# Altium PCB PCB.PcbDoc
Units mm, origin at the board's own origin, x right, y up, seen from the top; angles counter-clockwise.
Board outline 60.96 x 89.28 mm, 2 copper layers (Top Layer, Bottom Layer); 23 components, 27 nets, 93 pads, 0 vias.
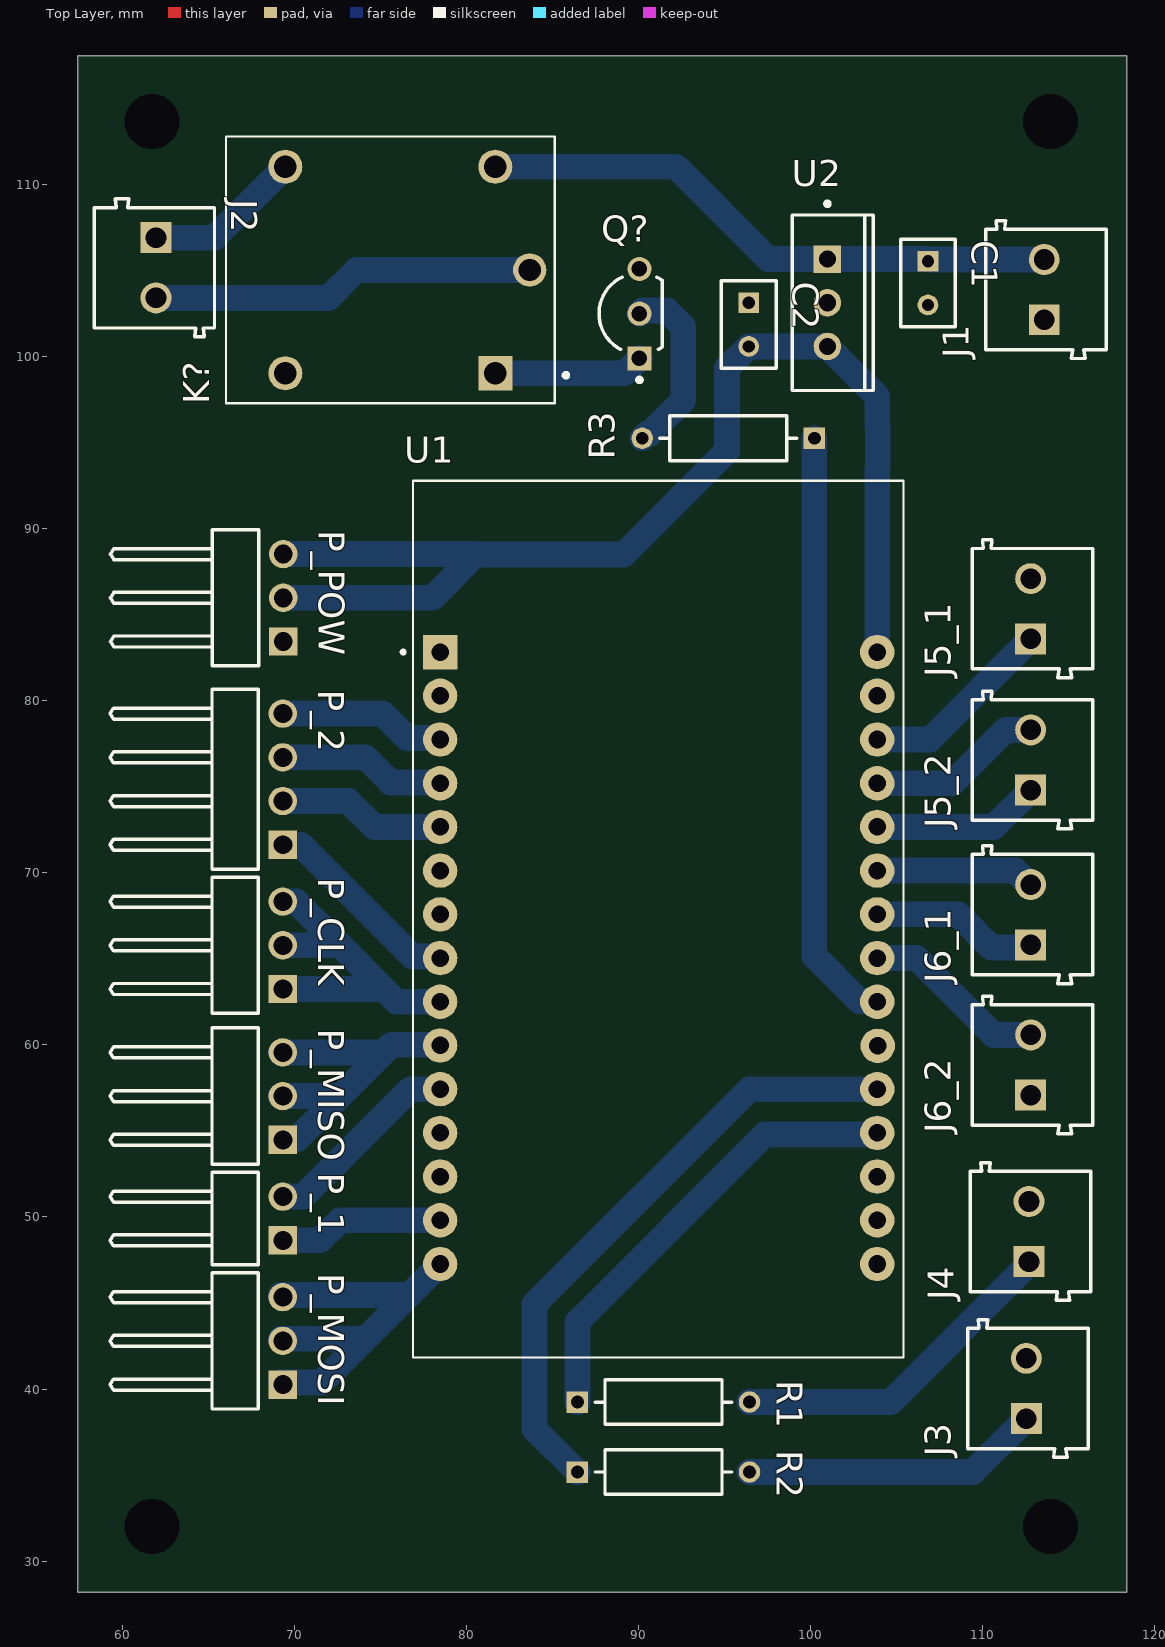
[diagram p0: Top Layer view]
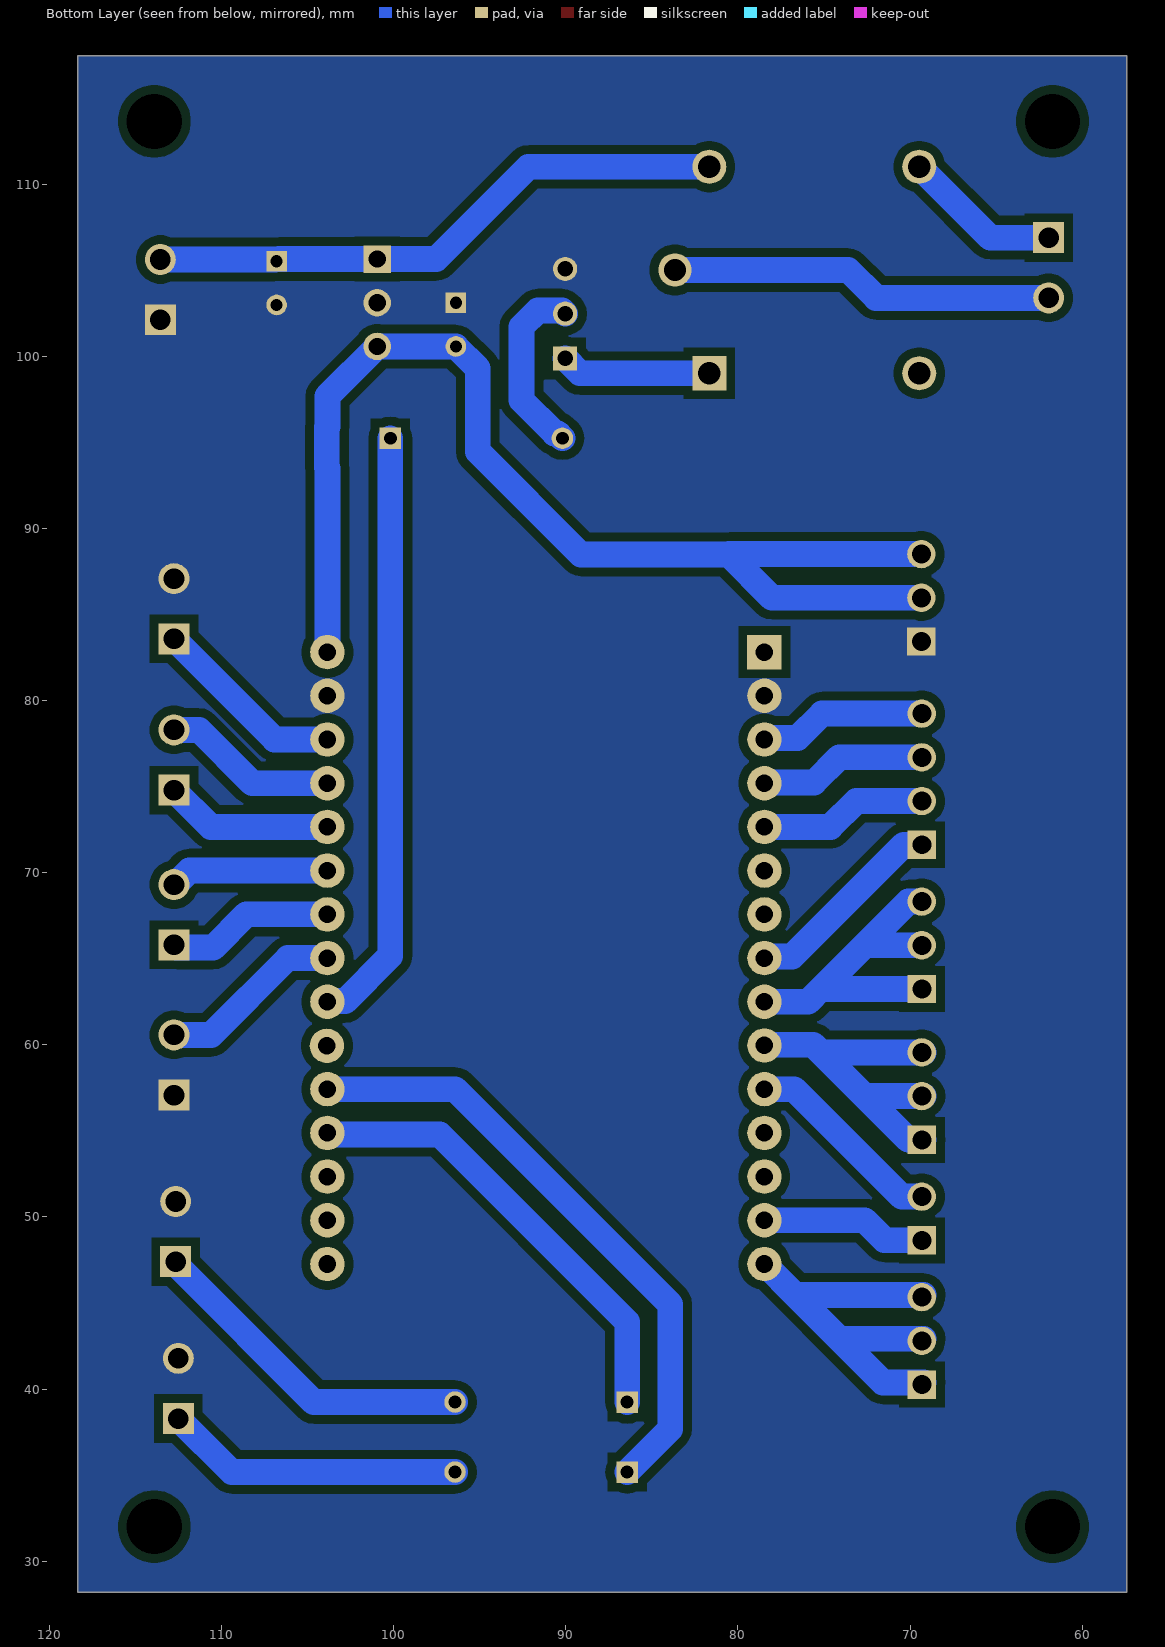
[diagram p1: Bottom Layer view, seen from below]
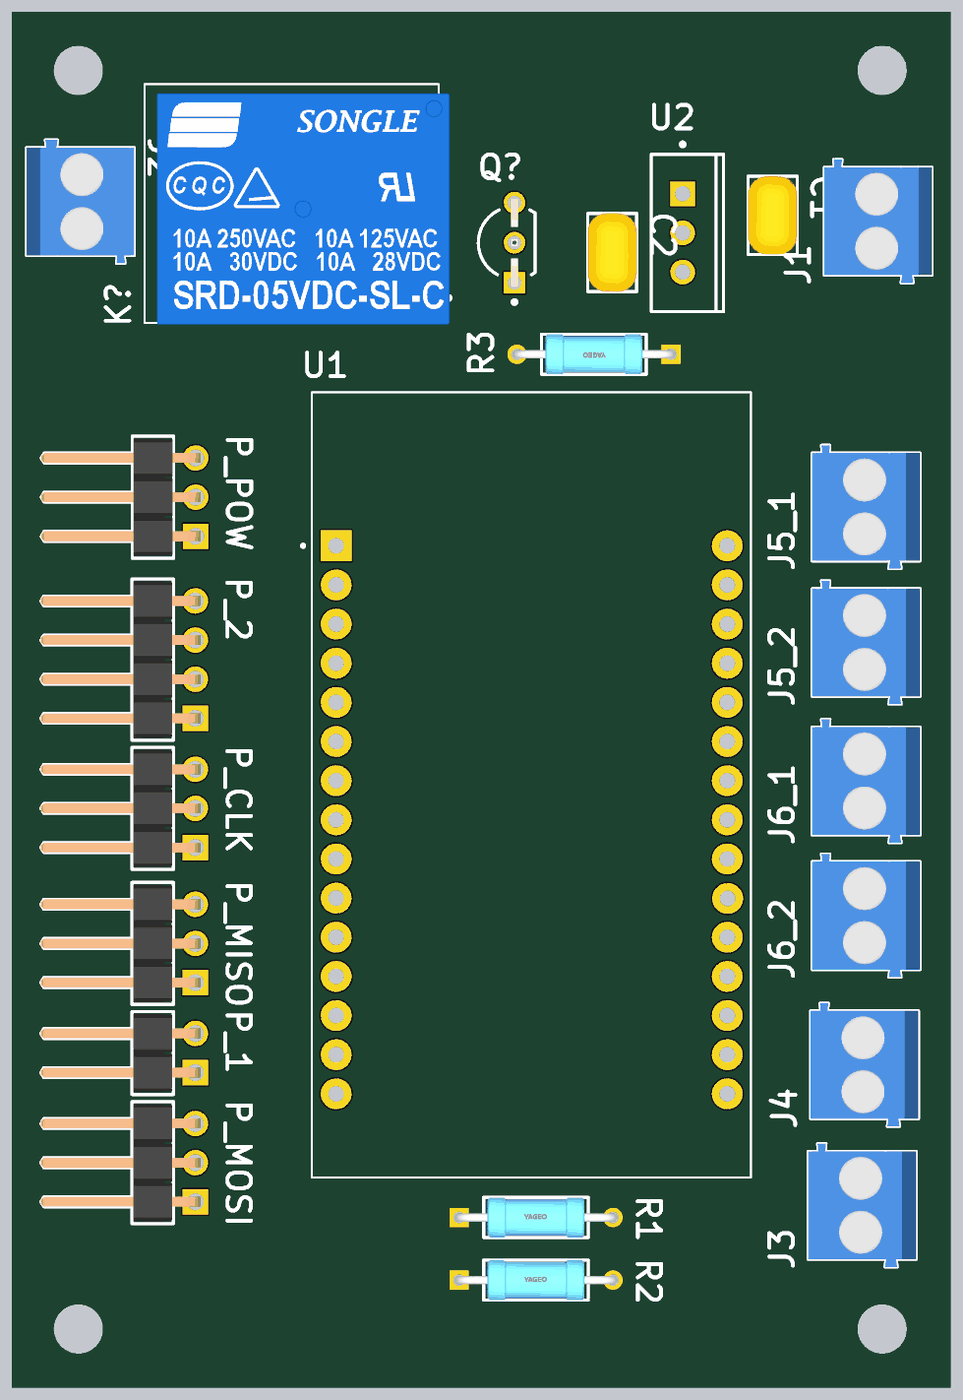
[diagram p2: 3D render of the assembled board from above, using the file's embedded part models]

## Layer stack, top to bottom
Top Solder: solder mask 0.0102, Solder Resist, Dk 3.5
Top Layer: signal copper 0.0356
Dielectric 1: dielectric 0.32, FR-4, Dk 4.8
Bottom Layer: signal copper 0.0356
Bottom Solder: solder mask 0.0102, Solder Resist, Dk 3.5

## Board outline
57.404,28.194 57.404,117.475 118.364,117.475 118.364,28.194

## Design rules (kind name [scope] priority, off if disabled: settings)
Clearance [All] p1: gap=0.5 ignorepadtopadclearanceinfootprint=TRUE except(1: Arc-Arc Arc-Track Track-Track)
PlaneClearance [All] p1: clearance=0.5
PlaneConnect [All] p1: planeconnectstyle=Direct reliefexpansion=0.508 reliefentries=4 reliefconductorwidth=0.254 reliefairgap=0.254
PolygonConnect [All] p1: connectstyle=Direct reliefconductorwidth=0.254 reliefentries=4 polygonreliefangle="90 Angle" airgapwidth=0.254
RoomDefinition Esquematico [InComponentClass('Esquematico')] p1: confinementstyle=ConfineIn formatcopy=TRUE lockcomponents=FALSE outline 57.531,28.321 117.983,28.321 117.983,117.094 57.531,117.094
RoutingLayers [All] p1: top layer_v5=FALSE bottom layer_v5=TRUE
RoutingVias [All] p1: holewidth=0.711 width=1.27 viastyle="Through Hole" minholewidth=0.711 minwidth=1.27 maxholewidth=0.711 maxwidth=1.27
SolderMaskExpansion [All] p1: expansion=0.102 istentingtop=FALSE
Width [All] p1: maxlimit=2 minlimit=1 preferedwidth=1.5
27 further rules are at their usual default settings.

## Components (designator, comment, footprint, x,y, rotation, side; value= is the part's Value field where it differs from the comment)
C1 "SR205C104KAR" FP-SR20-MFG 106.807,104.267 r270 top value=100nF
C2 "SR205C104KAR" FP-SR20-MFG 96.393,101.854 r270 top value=100nF
J1 "691103110002" 691103110002 113.665,103.886 r90 top
J2 "691103110002" 691103110002 61.849,105.156 r270 top
J3 "691103110002" 691103110002 112.622,40.033 r90 top
J4 "691103110002" 691103110002 112.776,49.149 r90 top
J5_1 "691103110002" 691103110002 112.876,85.344 r90 top
J5_2 "691103110002" 691103110002 112.876,76.553 r90 top
J6_1 "691103110002" 691103110002 112.876,67.564 r90 top
J6_2 "691103110002" 691103110002 112.876,58.829 r90 top
K? "SRD-05VDC-SL-C" RELAY_SRD-05VDC-SL-C 75.565,105.029 r180 top
P_1 "61300211021" 61300211021 66.548,49.911 r270 top
P_2 "61300411021" 61300411021 66.548,75.438 r270 top
P_CLK "61300311021" 61300311021 66.548,65.786 r270 top
P_MISO "61300311021" 61300311021 66.548,57.023 r270 top
P_MOSI "61300311021" 61300311021 66.548,42.799 r270 top
P_POW "61300311021" 61300311021 66.572,85.979 r270 top
Q? "P2N2222ARL1G" ONSC-TO-92-3-29-11_AM_BL 90.043,102.489 r90 top
R1 "MFR-25FBF52-1K18" FP-MFR-25-MFG 91.44,39.243 r0 top value=1.18kΩ
R2 "MFR-25FBF52-1K18" FP-MFR-25-MFG 91.44,35.179 r0 top value=1.18kΩ
R3 "MFR-25FBF52-1K18" FP-MFR-25-MFG 95.203,95.25 r180 top value=1.18kΩ
U1 "ESP32-DEVKIT-V1" MODULE_ESP32_DEVKIT_V1 91.162,67.31 r0 top locked
U2 "LM7805CT" FAIR-TO-220-3 100.965,103.124 r0 top

## Footprints (in the part's own frame and the unit in brackets; to place one, negate y for a bottom-side part, rotate by r counter-clockwise, add the part's x,y. Pads: shape width x height; smd on the part's side, far side on the other; paste and mask are expansions set on the pad)
61300211021 [mm] "Pin Header, pitch 2.54 mm, THT, Angled, single row, 2p"
  rect 1.65x1.65 hole 1.1: 1(1.27,2.77)
  round 1.65 hole 1.1: 2(-1.27,2.77)
  silkscreen extent -2.69,-7.27 2.69,1.35, body extent -2.54,-7.27 2.54,3.09, height 2.58
61300311021 [mm] "Pin Header, pitch 2.54 mm, THT, Angled, single row, 3p"
  rect 1.65x1.65 hole 1.1: 1(2.54,2.77)
  round 1.65 hole 1.1: 2(0,2.77) 3(-2.54,2.77)
  silkscreen extent -3.96,-7.27 3.96,1.35, body extent -3.81,-7.27 3.81,3.09, height 2.58
61300411021 [mm] "Pin Header, pitch 2.54 mm, THT, Angled, single row, 4p"
  rect 1.65x1.65 hole 1.1: 1(3.81,2.77)
  round 1.65 hole 1.1: 2(1.27,2.77) 3(-1.27,2.77) 4(-3.81,2.77)
  silkscreen extent -5.23,-7.27 5.23,1.35, body extent -5.08,-7.27 5.08,3.09, height 2.58
691103110002 [mm] "3,50mm - modular - blue - Horizontal wire entry - Pressure clamp - 8,4mm height - 02p"
  rect 1.8x1.8 hole 1.2: 1(-1.75,0.1)
  round 1.8 hole 1.2: 2(1.75,0.1)
  silkscreen extent -4,-3.5 4,3.5, body extent -4,-3.5 4,3.5, height 8.45
FAIR-TO-220-3 [mm] "FM, 3-Leads, Body 10.2x4.7mm, Pitch 2.54mm"
  rect 1.6x1.6 hole 1: 1(0,2.54)
  round 1.6 hole 1: 2(0,0) 3(0,-2.54)
  silkscreen extent -2.04,-5.1 2.66,5.87, body extent -2.04,-5.1 2.66,5.1, height 18.95
FP-MFR-25-MFG [mm]
  rect 1.25x1.25 hole 0.75 paste-1000 mask+0: 1(-5,0)
  round 1.25 hole 0.75 paste-1000 mask+0: 2(5,0)
  silkscreen extent -3.97,-1.3 3.97,1.3, body extent -5.72,-1.4 5.72,1.4, height 0.25
FP-SR20-MFG [mm]
  rect 1.2x1.2 hole 0.7 paste-1000 mask+0: 1(-1.27,0)
  round 1.2 hole 0.7 paste-1000 mask+0: 2(1.27,0)
  silkscreen extent -2.54,-1.59 2.54,1.59, body extent -2.64,-1.69 2.64,1.69, height 0.25
MODULE_ESP32_DEVKIT_V1 [mm]
  rect 2x2 hole 1.02: 1(-12.7,15.515)
  round 2 hole 1.02: 2(-12.7,12.975) 3(-12.7,10.435) 4(-12.7,7.895) 5(-12.7,5.355) 6(-12.7,2.815) 7(-12.7,0.275) 8(-12.7,-2.265) 9(-12.7,-4.805) 10(-12.7,-7.345) 11(-12.7,-9.885) 12(-12.7,-12.425) 13(-12.7,-14.965) 14(-12.7,-17.505) 15(-12.7,-20.045) 16(12.7,-20.045) 17(12.7,-17.505) 18(12.7,-14.965) 19(12.7,-12.425) 20(12.7,-9.885) 22(12.7,-4.805) 23(12.7,-2.265) 24(12.7,0.275) 25(12.7,2.815) 26(12.7,5.355) 27(12.7,7.895) 28(12.7,10.435) 29(12.7,12.975) 30(12.7,15.515)
  round 3 on Mech13: ""(-12.28,-23.475) ""(-12.28,23.475) ""(12.23,-23.475) ""(12.23,23.475)
  silkscreen extent -14.95,-25.47 14.23,25.47
ONSC-TO-92-3-29-11_AM_BL [mm] "TO, 3-Leads, Body Dia 4.7mm, Pitch 2.6mm"
  rect 1.4x1.4 hole 0.9: 1(-2.6,0)
  round 1.4 hole 0.9: 2(0,0) 3(2.6,0)
  silkscreen extent -3.97,-1.34 2.13,2.35, body extent -2.84,-1.34 2.84,2.35, height 5.33
RELAY_SRD-05VDC-SL-C [mm]
  rect 1.98x1.98 hole 1.32: A1(-6.1,6)
  round 1.98 hole 1.32: A2(-6.1,-6) NC(6.1,6) NO(6.1,-6)
  round 1.935 hole 1.29: COM(-8.1,0)
  silkscreen extent -10.3,-7.75 9.55,7.75, body extent -10.24,-7.15 8.76,7.85, height 16.15

## Part data
C1 C2: library part CMP-04427-000013-1, "CAP CER 0.1UF 50V X7R RADIAL", Capacitance=100nF, Manufacturer=AVX, Package=SR20, Temperature="-55°C to +125°C", Temperature Characteristic=X7R, Temperature Range High=+125°C, Temperature Range Low=-55°C, Tolerance=10%, Voltage=50V, Automotive=No, Category=Cap, ComponentLink2Description=Datasheet, ComponentLink2URL=http://datasheets.avx.com/SR-Series.pdf, Device Class L1="Passive Components", Device Class L2=Capacitors, Device Class L3="Ceramic Capacitors", Digikey Description="CAP CER 0.1UF 50V X7R RADIAL", Height=5.08mm, Lead Free=Yes, Manufacturer Part Number=SR205C104KAR, Material=Ceramic, Mouser Description="Multilayer Ceramic Capacitors MLCC - Leaded 50volts 0.1uF 10% X7R", Octopart=https://octopart.com/sr205c104kar-avx-145048, RoHS=TRUE, Voltage Rating=50V
J1 J2 J3 J4 J5_1 J5_2 J6_1 J6_2: library part CMP-1502-03254-1, "Series 1031 - 3.50 mm Horizontal Entry Modular with Pressure Clamp WR-TBL, 2 pin", Manufacturer="Wurth Elektronik", Operating Temperature=-40to105degC, Datasheet URL=http://katalog.we-online.de/em/datasheet/6911031100xx.pdf, Manufacturer URL=http://www.we-online.de, Mounting Technology=THT, Package Reference=691103110002, Packaging=Box, Part Number=691103110002, Pin Number=2, Pitch=3.50mm, Publisher=WurthElektronik
K?: "5V Trigger Relay Module For Arduino And Raspberry Pi 5V Trigger Relay Module For Arduino And Raspberry Pi", Package=None, Availability="Not in stock", Check_prices=https://www.snapeda.com/parts/SRD-05VDC-SL-C/Songle+Relay/view-part/?ref=eda, MF="Songle Relay", MP=SRD-05VDC-SL-C, Price=None, SnapEDA_Link=https://www.snapeda.com/parts/SRD-05VDC-SL-C/Songle+Relay/view-part/?ref=snap
P_1: library part CMP-1502-01059-1, "THT Angled Pin Header WR-PHD, Pitch 2.54 mm, Single Row, 2 pins", Contact Resistance=20mOhm, Manufacturer="Wurth Elektronik", Operating Temperature=-40to105degC, Rated Current=3A, Withstanding Voltage=500VAC, Working Voltage=250VAC, Datasheet URL=https://katalog.we-online.de/em/datasheet/6130xx11021.pdf, Gender=Male, Manufacturer URL=http://www.we-online.de, Mounting Technology=THT, Orientation=Angled, Package Reference=61300211021, Packaging=Bag, Part Number=61300211021, Pin Number=2, Pitch=2.54mm, Publisher=WurthElektronik, Row Number=Single
P_2: library part CMP-1502-01063-1, "THT Angled Pin Header WR-PHD, Pitch 2.54 mm, Single Row, 4 pins", Contact Resistance=20mOhm, Manufacturer="Wurth Elektronik", Operating Temperature=-40to105degC, Rated Current=3A, Withstanding Voltage=500VAC, Working Voltage=250VAC, Datasheet URL=https://katalog.we-online.de/em/datasheet/6130xx11021.pdf, Gender=Male, Manufacturer URL=http://www.we-online.de, Mounting Technology=THT, Orientation=Angled, Package Reference=61300411021, Packaging=Bag, Part Number=61300411021, Pin Number=4, Pitch=2.54mm, Publisher=WurthElektronik, Row Number=Single
P_CLK P_MISO P_MOSI P_POW: library part CMP-1502-01061-1, "THT Angled Pin Header WR-PHD, Pitch 2.54 mm, Single Row, 3 pins", Contact Resistance=20mOhm, Manufacturer="Wurth Elektronik", Operating Temperature=-40to105degC, Rated Current=3A, Withstanding Voltage=500VAC, Working Voltage=250VAC, Datasheet URL=https://katalog.we-online.de/em/datasheet/6130xx11021.pdf, Gender=Male, Manufacturer URL=http://www.we-online.de, Mounting Technology=THT, Orientation=Angled, Package Reference=61300311021, Packaging=Bag, Part Number=61300311021, Pin Number=3, Pitch=2.54mm, Publisher=WurthElektronik, Row Number=Single
Q?: library part CMP-1048-01587-1, "Amplifier Transistor, NPN Silicon, 3-Pin TO-92, Pb-Free, Tape and Reel", Manufacturer="On Semiconductor", ComponentLink1Description="Manufacturer URL", ComponentLink1URL=http://www.onsemi.com/, ComponentLink2Description=Datasheet, ComponentLink2URL=http://www.onsemi.com/pub_link/Collateral/P2N2222A-D.PDF, ComponentLink3Description="Package Specification", ComponentLink3URL=http://www.onsemi.com/pub_link/Collateral/MAC97-D.PDF, DatasheetVersion="Rev. 7", fT Min (MHz)=300, IC Continuous (A)=0.6, Mounting Technology="Through Hole", PackageDescription="3-Pin Transistor Outline, Body 4.825 x 3.685 mm, Pitch 1.27 mm", PackageReference=TO-92-3-29-11_AM_BL, PackageVersion="Rev. AM", Packing="Tape and Reel", PartNumber=P2N2222ARL1G, Polarity=NPN, RoHS=TRUE
R1 R2 R3: library part CMP-03413-000001-1, "RES 1.18K OHM 1/4W 1% AXIAL", Manufacturer=Yageo, Package=MFR-25, Power Rating=0.25W, Resistance=1.18kΩ, Temperature="-55°C to +155°C", Temperature Coefficient=100ppm/°C, Temperature Range High=+155°C, Temperature Range Low=-55°C, Tolerance=1%, Voltage Rating=250V, Automotive=No, Category=Res, ComponentLink2Description=Datasheet, ComponentLink2URL=https://www.yageo.com/upload/media/product/products/datasheet/lr/Yageo_LR_MFR_1.pdf, Composition="Metal Film", Device Class L1="Passive Components", Device Class L2=Resistors, Device Class L3="Through-Hole Resistors", Digikey Description="RES 1.18K OHM 1/4W 1% AXIAL", Height=2.6mm, Ipc Land Pattern Name=RESAD1000W75L680D260, Lead Free=Yes, Manufacturer Part Number=MFR-25FBF52-1K18, Mouser Description="Metal Film Resistors 1.18K OHM 1/4W 1%", Octopart=https://octopart.com/mfr-25fbf52-1k18-yageo-56251681, RoHS=TRUE, Series=MFR
U1: "Dual core, Wi-Fi: 2.4 GHz up to 150 Mbits/s,BLE (Bluetooth Low Energy) and legacy Bluetooth, 32 bits, Up to 240 MHz", Package=None, Availability="Not in stock", Check_prices=https://www.snapeda.com/parts/ESP32-DEVKIT-V1/Do+it/view-part/?ref=eda, MF="Do it", MP=ESP32-DEVKIT-V1, Price=None, SnapEDA_Link=https://www.snapeda.com/parts/ESP32-DEVKIT-V1/Do+it/view-part/?ref=snap
U2: library part CMP-2000-04938-1, "Positive Voltage Regulator, 5 V, 1 A, -40 to 125 degC, 3-Pin TO-220, RoHS, Tube", Manufacturer=FairchildSemiconductor, Maximum Input Voltage=35V, Maximum Output Current=2.2(Typ)A, Maximum Quiescent Current=8mA, Operating Temperature=-40to125degC, Output Voltage=5V, Package=3TO-220AB, Package Description="3-Pin Through Hole Device, Body 10 x 4.5 mm, Pitch 2.54 mm", Package Reference=TO-220, Typical Dropout Voltage @ Current=2@1AV, Accuracy=±4%, Category=LinearRegulator, Datasheet URL=https://datasheet.ciiva.com/26904/lm7805ct-26904988.pdf, Datasheet Version=Aug-12, Line Regulation=100mV, Load Regulation=100mV, Manufacturer URL=https://www.fairchildsemi.com/, Mounting=ThroughHole, Number of Outputs=1, Output Type=Fixed, Package URL=https://www.fairchildsemi.com/package-drawings/TO/TO220B03.pdf, Packaging=Rail/Tube, Polarity=Positive, Rad Hard=No, Type=Linear

## Free pads (board coordinates)
  round 2 hole 1.02: 21(103.886,59.944)
  round 3 hole 3.2 unplated: ""(61.722,32.004) ""(61.722,113.665) ""(113.919,32.004) ""(113.919,113.665)

## Nets (pads, with @x,y where several pads share a name; then routed paths per layer and width w, separated by ;. In a path a pad name is that pad's centre, name@x,y a point inside that pad or via, vN(x,y) a via of type N, cw(c..) or ccw(c..) an arc to the next point about the centre after c; other vN are vias at no path point)
GND: C1.2 C2.1 J1.1 J3.2 J4.2 J5_1.2 J6_2.1 P_POW.1 Q?.3 U1.2 U1.29 U2.2
NetC1_1: C1.1 J1.2 K?.A2 U2.1 | length 33.9
  Bottom Layer w1.5: K?.A2 92.171,111.029 97.536,105.664 U2.1 C1.1@106.68,105.664 ; C1.1@106.906,105.636 J1.2
NetC2_2: C2.2 P_POW.2 P_POW.3 U1.30 U2.3 | length 70.7
  Bottom Layer w1.5: P_POW.2 78.031,85.979 80.544,88.493 ; P_POW.3 80.518,88.519 80.544,88.493 ; U1.30 103.862,93.501 103.893,93.532 103.893,95.905 103.862,95.936 103.862,97.687 U2.3 C2.2 95.123,99.314 95.123,94.488 89.128,88.493 80.544,88.493
NetJ2_1: J2.1 K?.NO | length 9.2
  Bottom Layer w1.5: J2.1 65.342,106.906 K?.NO
NetJ2_2: J2.2 K?.COM | length 22.4
  Bottom Layer w1.5: J2.2 71.977,103.406 73.6,105.029 K?.COM
NetJ3_1: J3.1 R2.2 | length 17.4
  Bottom Layer w1.5: R2.2 109.418,35.179 J3.1
NetJ4_1: J4.1 R1.2 | length 19.6
  Bottom Layer w1.5: R1.2 104.648,39.243 112.526,47.121 112.526,47.249 112.548,47.271 J4.1@112.676,47.271
NetJ5_1_1: J5_1.1 U1.28 | length 11.3
  Bottom Layer w1.5: U1.28 106.927,77.745 J5_1.1
NetJ5_2_1: J5_2.1 U1.26 | length 9.8
  Bottom Layer w1.5: U1.26 110.638,72.665 J5_2.1
NetJ5_2_2: J5_2.2 U1.27 | length 10.2
  Bottom Layer w1.5: U1.27 108.225,75.205 111.322,78.302 J5_2.2
NetJ6_1_1: J6_1.1 U1.24 | length 9.8
  Bottom Layer w1.5: U1.24 108.564,67.585 110.495,65.654 111.738,65.654 111.749,65.664 112.626,65.664 J6_1.1
NetJ6_1_2: J6_1.2 U1.25 | length 9.1
  Bottom Layer w1.5: U1.25@103.997,70.125 111.884,70.125 112.695,69.314 J6_1.2
NetJ6_2_2: J6_2.2 U1.23 | length 10.8
  Bottom Layer w1.5: U1.23 106.151,65.045 110.617,60.579 J6_2.2
NetK?_A1: K?.A1 Q?.1 | length 8.7
  Bottom Layer w1.5: K?.A1 89.183,99.029 Q?.1
NetP_1_1: P_1.1 U1.14 | length 9.6
  Bottom Layer w1.5: P_1.1 71.481,48.641 72.645,49.805 U1.14
NetP_1_2: P_1.2 U1.11 | length 11.7
  Bottom Layer w1.5: P_1.2 70.485,51.181 76.729,57.425 U1.11
NetP_2_1: P_2.1 U1.8 | length 11.9
  Bottom Layer w1.5: P_2.1 70.358,71.628 76.845,65.141 78.366,65.141 U1.8
NetP_2_2: P_2.2 U1.5 | length 9.8
  Bottom Layer w1.5: P_2.2 73.126,74.168 74.629,72.665 U1.5
NetP_2_3: P_2.3 U1.4 | length 9.8
  Bottom Layer w1.5: P_2.3 74.121,76.708 75.584,75.245 78.422,75.245 U1.4
NetP_2_4: P_2.4 U1.3 | length 9.8
  Bottom Layer w1.5: P_2.4 75.117,79.248 76.524,77.841 78.366,77.841 U1.3
NetP_CLK_1: P_CLK.1 P_CLK.2 P_CLK.3 U1.9 | length 20.7
  Bottom Layer w1.5: P_CLK.1 75.184,63.246 ; P_CLK.2 72.644,65.786 ; P_CLK.3 70.104,68.326 72.644,65.786 ; U1.9 75.925,62.505 75.184,63.246 ; 72.644,65.786 75.184,63.246
NetP_MISO_1: P_MISO.1 P_MISO.2 P_MISO.3 U1.10 | length 20.9
  Bottom Layer w1.5: P_MISO.1@69.215,54.483 70.104,54.483 72.581,56.959 ; P_MISO.2@69.215,57.023 72.517,57.023 72.581,56.959 ; P_MISO.3@69.215,59.563 75.184,59.563 ; U1.10 78.422,60.005 75.626,60.005 75.184,59.563 ; 72.581,56.959 75.184,59.563
NetP_MOSI_1: P_MOSI.1 P_MOSI.2 P_MOSI.3 U1.15 | length 24.5
  Bottom Layer w1.5: P_MOSI.1@69.215,40.386 71.583,40.386 74.123,42.926 ; P_MOSI.2@69.215,42.926 74.123,42.926 ; P_MOSI.3@69.215,45.466 76.663,45.466 ; U1.15 76.663,45.466 ; 74.123,42.926 76.663,45.466
NetQ?_2: Q?.2 R3.2 | length 10.6
  Bottom Layer w1.5: Q?.2 90.224,102.67 91.64,102.67 92.583,101.727 92.583,97.456 90.657,95.53 90.483,95.53 R3.2
NetR1_1: R1.1 U1.19 | length 26.6
  Bottom Layer w1.5: R1.1 86.44,43.895 97.334,54.789 103.766,54.789 U1.19
NetR2_1: R2.1 U1.20 | length 35.9
  Bottom Layer w1.5: R2.1 83.94,37.679 83.94,44.931 96.434,57.425 U1.20
NetR3_1: R3.1 U1.22 | length 34.8
  Bottom Layer w1.5: R3.1 100.203,93.345 100.203,65.168 102.826,62.545 103.822,62.545 U1.22
pads on no net: K?.NC U1. U1.1 U1.6 U1.7 U1.12 U1.13 U1.16 U1.17 U1.18

## Polygon pours and split planes (outlines as drawn)
GND on Bottom Layer "GND_L02_P000" (solid, pour order 0): 57.404,117.475 118.364,117.475 118.364,28.194 57.404,28.194

## Silkscreen, mask and mechanical layers (free items; w line width, h text height)
Mechanical 1:
  the board outline again, w1.2